# Altium PCB MicrophoneArray.Sensors.WithConnector.ForPcbFactory.PcbDoc
Units mm, origin at the board's own origin, x right, y up, seen from the top; angles counter-clockwise.
Board outline 43 x 43 mm, 2 copper layers (Top Layer, Bottom Layer); 30 components, 13 nets, 83 pads, 50 vias.
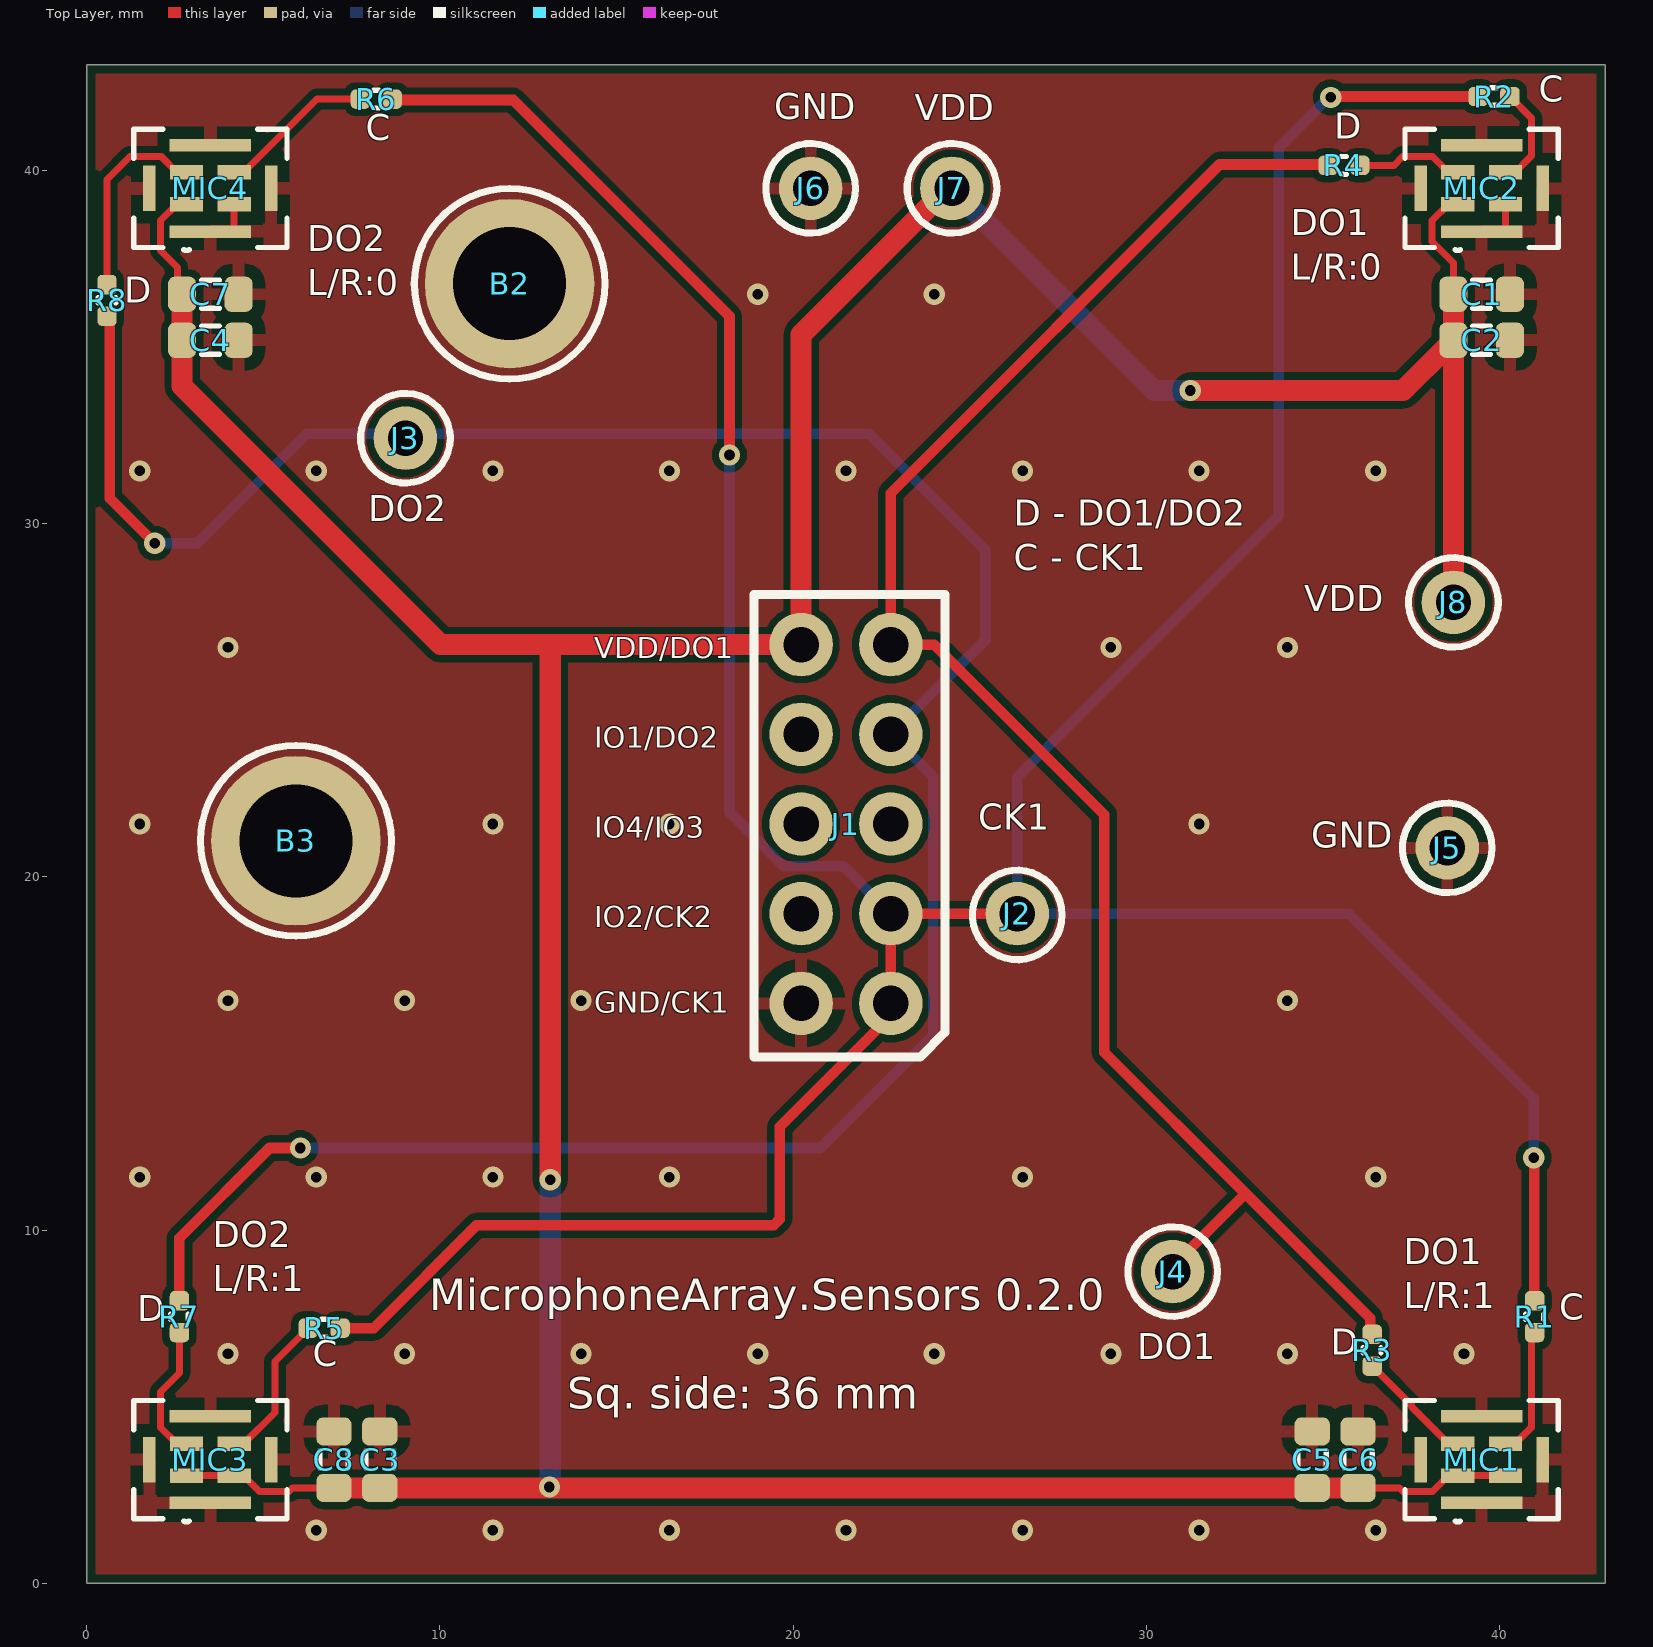
[diagram p0: Top Layer view]
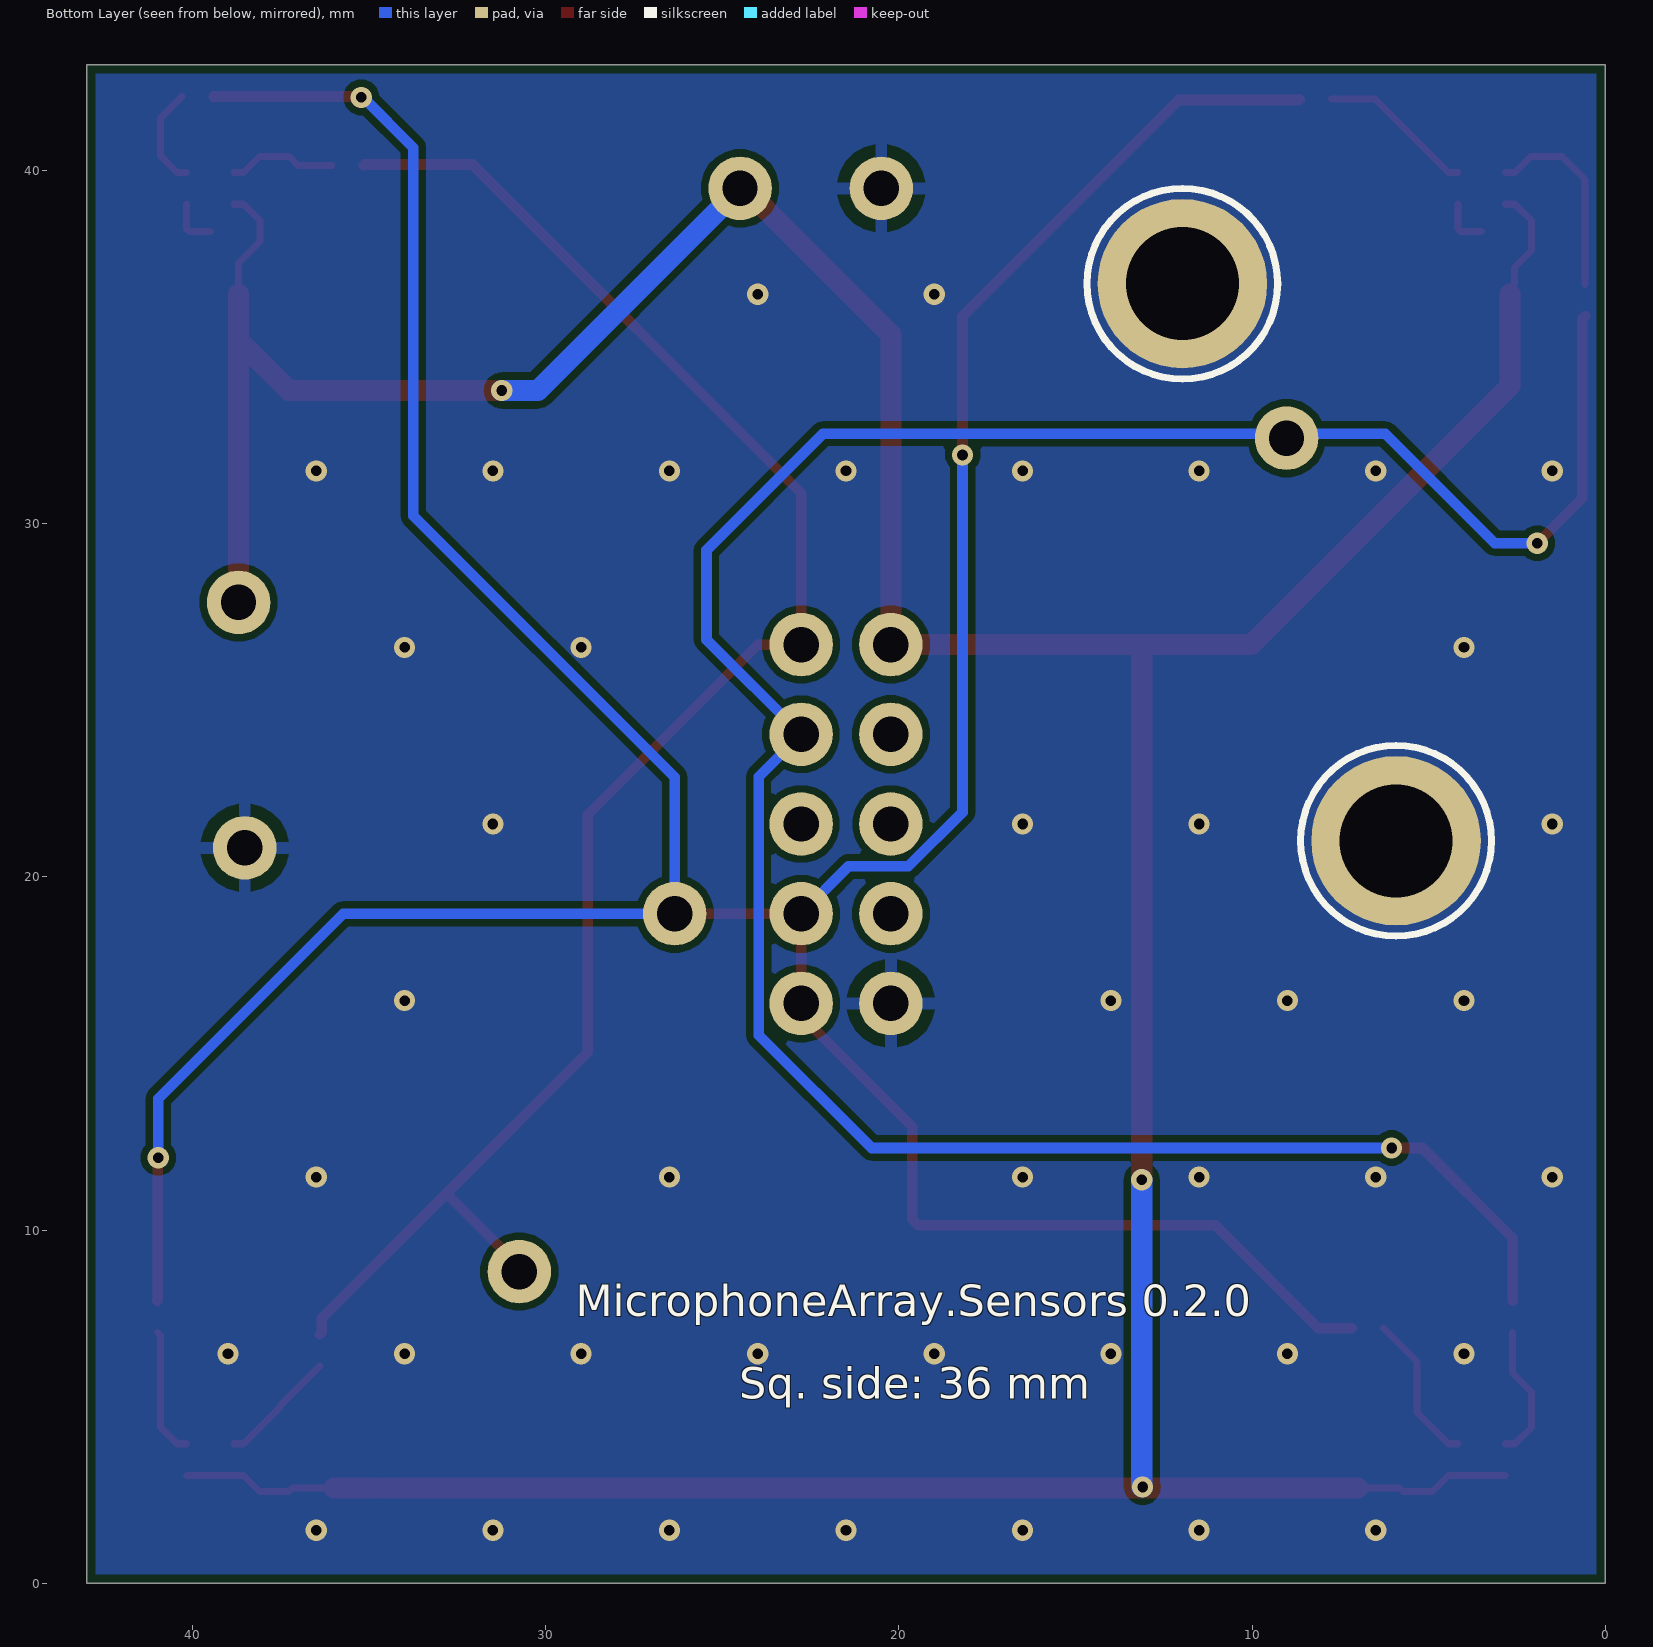
[diagram p1: Bottom Layer view, seen from below]
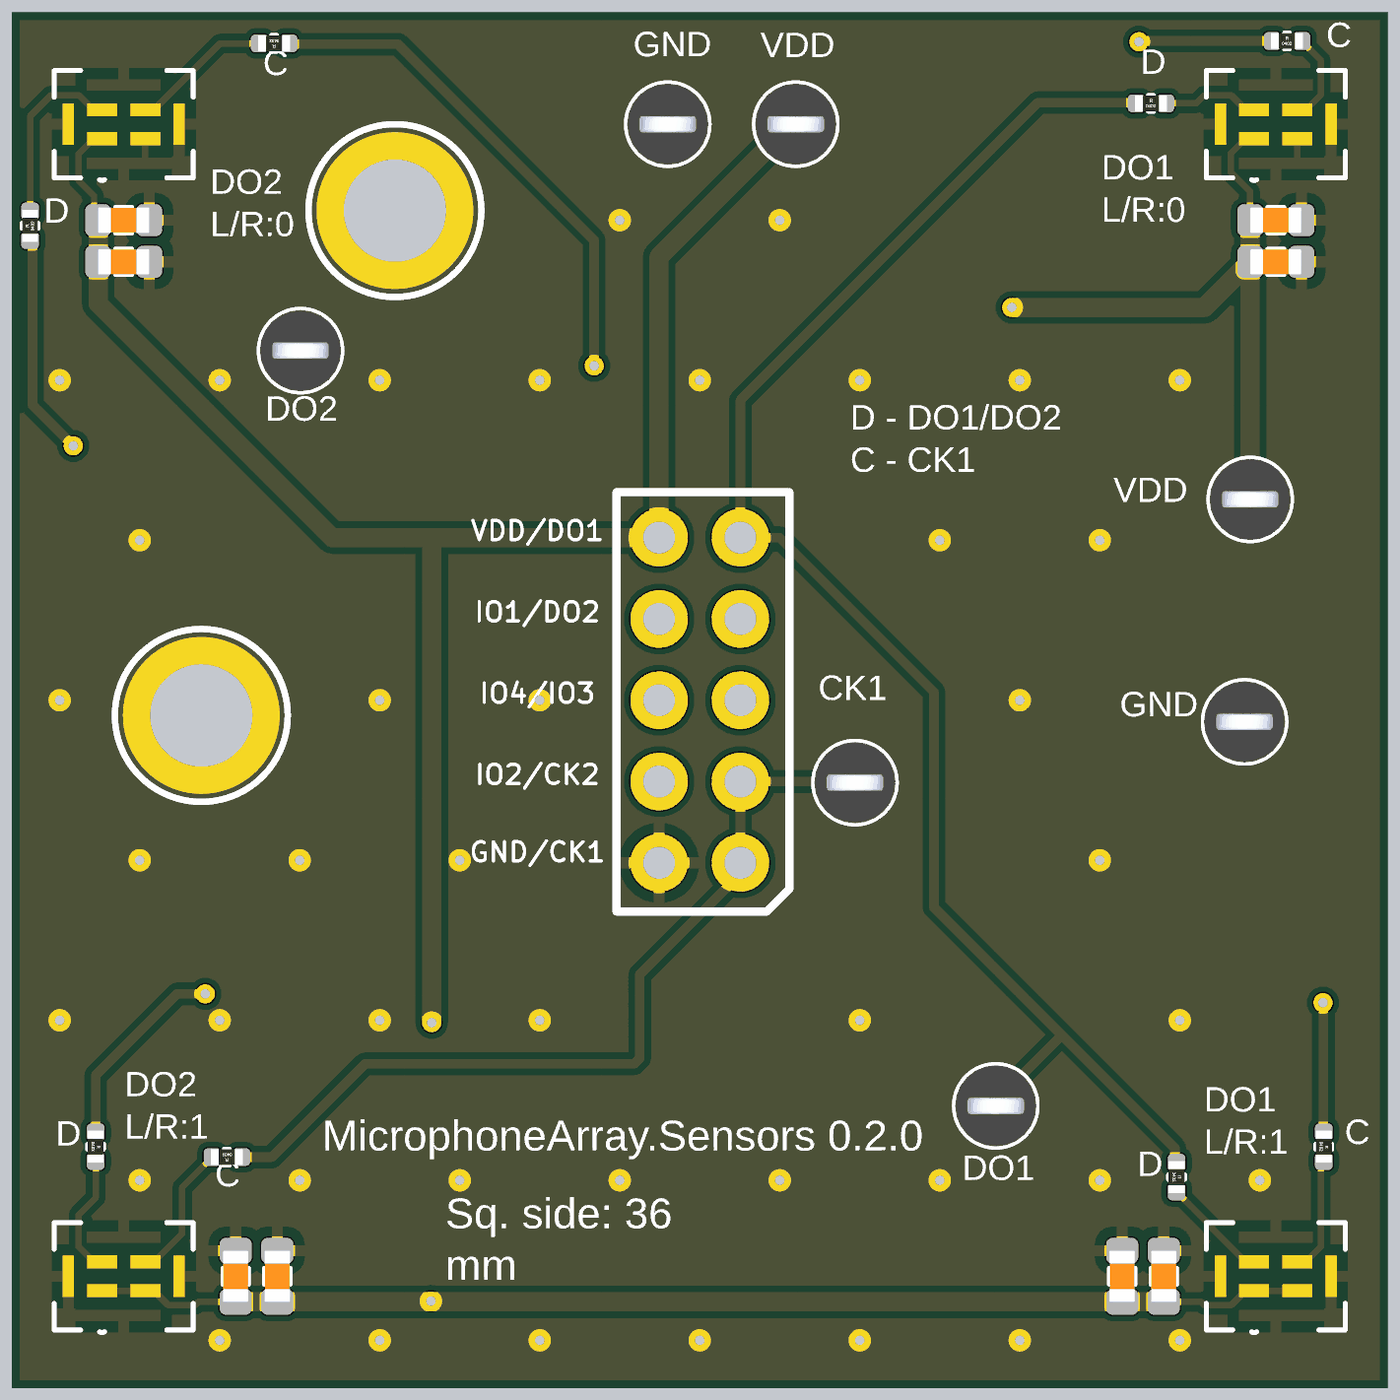
[diagram p2: 3D render of the assembled board from above, using the file's embedded part models]

## Layer stack, top to bottom
Top Solder: solder mask 0.0102, Solder Resist, Dk 3.5
Top Layer: signal copper 0.0356
Dielectric 1: dielectric 0.32, FR-4, Dk 4.8
Bottom Layer: signal copper 0.0356
Bottom Solder: solder mask 0.0102, Solder Resist, Dk 3.5

## Board outline
0,0 0,43 43,43 43,0

## Design rules (kind name [scope] priority, off if disabled: settings)
AcuteAngle [All] p1: minimum=3.50000000000000E+0001 checktracksonly=FALSE
BoardOutlineClearance "BoardOutlineClearance 1" [All] p1: gap=0.25 ignorepadtopadclearanceinfootprint=FALSE except(0: Arc-SplitContinuation Track-SplitContinuation SMDPad-SplitContinuation THPad-SplitContinuation Via-SplitContinuation Fill-SplitContinuation Poly-SplitContinuation Region-SplitContinuation Text-SplitContinuation) // Milling
BoardOutlineClearance "BoardOutlineClearance 2" [All] p2: gap=0.4 ignorepadtopadclearanceinfootprint=FALSE except(0: Arc-SplitContinuation Track-SplitContinuation SMDPad-SplitContinuation THPad-SplitContinuation Via-SplitContinuation Fill-SplitContinuation Poly-SplitContinuation Region-SplitContinuation Text-SplitContinuation) // V-Cut
Clearance "Clearance-2 1 Oz" [All] p1: gap=0.15 ignorepadtopadclearanceinfootprint=FALSE except(0.2: Arc-Fill Arc-Poly Track-Fill Track-Poly SMDPad-Fill SMDPad-Poly THPad-Fill THPad-Poly Via-Fill Via-Poly Fill-Fill Fill-Poly Poly-Poly; 0.25: Arc-Hole Track-Hole SMDPad-Hole THPad-Hole Via-Hole Fill-Hole Poly-Hole Region-Hole Text-Hole) // Advance
Clearance "Clearance 3 Oz" [All] p2: gap=0.35 ignorepadtopadclearanceinfootprint=FALSE except(0.25: Arc-Hole Track-Hole SMDPad-Hole THPad-Hole Via-Hole Fill-Hole Poly-Hole Region-Hole Text-Hole)
Clearance "Clearance 2 Oz" [All] p3: gap=0.3 ignorepadtopadclearanceinfootprint=FALSE except(0.25: Arc-Hole Track-Hole SMDPad-Hole THPad-Hole Via-Hole Fill-Hole Poly-Hole Region-Hole Text-Hole)
Clearance "Clearance-1 1 Oz" [All] p4: gap=0.2 ignorepadtopadclearanceinfootprint=FALSE except(0.25: Arc-Hole Track-Hole SMDPad-Hole THPad-Hole Via-Hole Fill-Hole Poly-Hole Region-Hole Text-Hole) // Standart
Clearance "Clearance-1 1/2 Oz" [All] p5: gap=0.125 ignorepadtopadclearanceinfootprint=FALSE except(0.2: Arc-Fill Arc-Poly Track-Fill Track-Poly SMDPad-SMDPad SMDPad-Fill SMDPad-Poly THPad-Fill THPad-Poly Via-Fill Via-Poly Fill-Fill Fill-Poly Poly-Poly Poly-Region Poly-Text; 0.25: Arc-Hole Track-Hole SMDPad-Hole THPad-Hole Via-Hole Fill-Hole Poly-Hole Region-Hole Text-Hole) // Standart
Clearance "Clearance-2 1/2 Oz" [All] p6: gap=0.1 ignorepadtopadclearanceinfootprint=FALSE except(0.15: Arc-Fill Arc-Poly Track-Fill Track-Poly SMDPad-SMDPad SMDPad-Fill SMDPad-Poly THPad-Fill THPad-Poly Via-Fill Via-Poly Fill-Fill Fill-Poly Poly-Poly Poly-Region Poly-Text; 0.25: Arc-Hole Track-Hole SMDPad-Hole THPad-Hole Via-Hole Fill-Hole Poly-Hole Region-Hole Text-Hole) // Advance
DiffPairsRouting "DiffPairsRouting 1 Oz" [All] p1: maxlimit=0.254 minlimit=0.2 mostfreqgap=0.254 toplayer_minwidth=0.2 toplayer_maxwidth=0.381 toplayer_prefwidth=0.381 bottomlayer_minwidth=0.2 bottomlayer_maxwidth=0.381 bottomlayer_prefwidth=0.381 maxuncoupledlength=12.7
DiffPairsRouting "DiffPairsRouting 1/2 Oz" [All] p2: maxlimit=0.254 minlimit=0.1 mostfreqgap=0.254 toplayer_minwidth=0.1 toplayer_maxwidth=0.381 toplayer_prefwidth=0.381 bottomlayer_minwidth=0.1 bottomlayer_maxwidth=0.381 bottomlayer_prefwidth=0.381 maxuncoupledlength=12.7
HoleSize "Minimum HoleSize" [IsPad] p1: absolutevalues=TRUE maxlimit=5.9 minlimit=0.6 maxpercent=80.000 minpercent=20.000
HoleSize "Minimum HoleSize VIA 1" [IsVia] p2: absolutevalues=TRUE maxlimit=5.9 minlimit=0.3 maxpercent=80.000 minpercent=20.000 // Standart
HoleSize "Minimum HoleSize VIA 2" [IsVia] p3: absolutevalues=TRUE maxlimit=5.9 minlimit=0.2 maxpercent=80.000 minpercent=20.000 // Advance
HoleToHoleClearance Hole2HoleClearance [All] p1: gap=0.25 allowstackedmicrovias=FALSE
MinimumAnnularRing "Minimum AR VIA Standart" [IsVia] p1: minimumring=0.15
MinimumAnnularRing "Minimum AR PAD Standart" [IsPAD] p2: minimumring=0.2
MinimumAnnularRing "Minimum AR VIA Advance" [IsVia] p3: minimumring=0.1
MinimumAnnularRing "Minimum AR PAD Advance" [IsPAD] p4: minimumring=0.15
MinimumSolderMaskSliver "SolderMask Bridge Standart" [All] p1: minsoldermaskwidth=0.15 // All Masks
MinimumSolderMaskSliver "SolderMask Bridge Advance" [All] p2: minsoldermaskwidth=0.1 // Mask LDI
PlaneClearance "PlaneClearance 3 Oz" [All] p1: clearance=0.35
PlaneClearance "PlaneClearance 2 Oz" [All] p2: clearance=0.3
PlaneClearance "PlaneClearance 1 Oz" [All] p3: clearance=0.2
PlaneClearance "PlaneClearance-1 1/2 Oz" [All] p4: clearance=0.2 // Standart
PlaneClearance "PlaneClearance-2 1/2 Oz" [All] p5: clearance=0.15 // Advance
PlaneConnect "TermalConnect 3 Oz" [All] p1: planeconnectstyle=Relief reliefexpansion=0.2 reliefentries=4 reliefconductorwidth=0.35 reliefairgap=0.35 // Standart
PlaneConnect "TermalConnect 2 Oz" [All] p2: planeconnectstyle=Relief reliefexpansion=0.2 reliefentries=4 reliefconductorwidth=0.3 reliefairgap=0.3 // Standart
PlaneConnect "TermalConnect-1 1 Oz" [All] p3: planeconnectstyle=Relief reliefexpansion=0.2 reliefentries=4 reliefconductorwidth=0.2 reliefairgap=0.2 // Standart
PlaneConnect "TermalConnect-2 1 Oz" [All] p4: pad.planeconnectstyle=Relief pad.reliefexpansion=0.15 pad.reliefentries=4 pad.reliefconductorwidth=0.2 pad.reliefairgap=0.2 via.planeconnectstyle=Direct via.reliefexpansion=0.15 via.reliefentries=4 via.reliefconductorwidth=0.15 via.reliefairgap=0.15 // Advance
PlaneConnect "TermalConnect-1 1/2 Oz" [All] p5: planeconnectstyle=Relief reliefexpansion=0.2 reliefentries=4 reliefconductorwidth=0.2 reliefairgap=0.2 // Standart
PlaneConnect "TermalConnect-2 1/2 Oz" [All] p6: pad.planeconnectstyle=Relief pad.reliefexpansion=0.15 pad.reliefentries=4 pad.reliefconductorwidth=0.15 pad.reliefairgap=0.15 via.planeconnectstyle=Direct via.reliefexpansion=0.15 via.reliefentries=4 via.reliefconductorwidth=0.15 via.reliefairgap=0.15 // Advance
PolygonConnect "PolygonConnect 3 Oz" [All] p1: thpad.connectstyle=Relief thpad.reliefconductorwidth=0.35 thpad.reliefentries=4 thpad.polygonreliefangle="90 Angle" thpad.airgapwidth=0.35 smdpad.connectstyle=Relief smdpad.reliefconductorwidth=0.35 smdpad.reliefentries=4 smdpad.polygonreliefangle="90 Angle" smdpad.airgapwidth=0.35 via.connectstyle=Direct via.reliefconductorwidth=0.254 via.reliefentries=4 via.polygonreliefangle="90 Angle" via.airgapwidth=0.254
PolygonConnect "PolygonConnect 2 Oz" [All] p2: thpad.connectstyle=Relief thpad.reliefconductorwidth=0.3 thpad.reliefentries=4 thpad.polygonreliefangle="90 Angle" thpad.airgapwidth=0.3 smdpad.connectstyle=Relief smdpad.reliefconductorwidth=0.3 smdpad.reliefentries=4 smdpad.polygonreliefangle="90 Angle" smdpad.airgapwidth=0.3 via.connectstyle=Direct via.reliefconductorwidth=0.254 via.reliefentries=4 via.polygonreliefangle="90 Angle" via.airgapwidth=0.254
PolygonConnect "PolygonConnect-1 1 Oz" [All] p3: thpad.connectstyle=Relief thpad.reliefconductorwidth=0.2 thpad.reliefentries=4 thpad.polygonreliefangle="90 Angle" thpad.airgapwidth=0.2 smdpad.connectstyle=Relief smdpad.reliefconductorwidth=0.2 smdpad.reliefentries=4 smdpad.polygonreliefangle="90 Angle" smdpad.airgapwidth=0.2 via.connectstyle=Direct via.reliefconductorwidth=0.254 via.reliefentries=4 via.polygonreliefangle="90 Angle" via.airgapwidth=0.254 // Standart
PolygonConnect "PolygonConnect-2 1 Oz" [All] p4: thpad.connectstyle=Relief thpad.reliefconductorwidth=0.15 thpad.reliefentries=4 thpad.polygonreliefangle="90 Angle" thpad.airgapwidth=0.15 smdpad.connectstyle=Relief smdpad.reliefconductorwidth=0.15 smdpad.reliefentries=4 smdpad.polygonreliefangle="90 Angle" smdpad.airgapwidth=0.15 via.connectstyle=Direct via.reliefconductorwidth=0.254 via.reliefentries=4 via.polygonreliefangle="90 Angle" via.airgapwidth=0.254 // Advance
PolygonConnect "PolygonConnect-1 1/2 Oz" [All] p5: thpad.connectstyle=Relief thpad.reliefconductorwidth=0.15 thpad.reliefentries=4 thpad.polygonreliefangle="90 Angle" thpad.airgapwidth=0.2 smdpad.connectstyle=Relief smdpad.reliefconductorwidth=0.2 smdpad.reliefentries=4 smdpad.polygonreliefangle="90 Angle" smdpad.airgapwidth=0.2 via.connectstyle=Direct via.reliefconductorwidth=0.254 via.reliefentries=4 via.polygonreliefangle="90 Angle" via.airgapwidth=0.254 // Standart
PolygonConnect "PolygonConnect-2 1/2 Oz" [All] p6: thpad.connectstyle=Relief thpad.reliefconductorwidth=0.125 thpad.reliefentries=4 thpad.polygonreliefangle="90 Angle" thpad.airgapwidth=0.15 smdpad.connectstyle=Relief smdpad.reliefconductorwidth=0.125 smdpad.reliefentries=4 smdpad.polygonreliefangle="90 Angle" smdpad.airgapwidth=0.15 via.connectstyle=Direct via.reliefconductorwidth=0.254 via.reliefentries=4 via.polygonreliefangle="90 Angle" via.airgapwidth=0.254 // Advance
RoutingCorners [All] p1 off: cornerstyle=45-Degree minsetback=2.54 maxsetback=2.54
RoutingVias [All] p1: holewidth=0.3 width=0.6 viastyle="Through Hole" minholewidth=0.2 minwidth=0.4 maxholewidth=5.9 maxwidth=6.4
SilkToSilkClearance Silk2SilkClearance [All] p1 off: silktosilkclearance=0.15
SilkToSolderMaskClearance Silk2SolderMaskClearance [IsPad] p1 off: minsilkscreentomaskgap=0.15 clearancetoexposedcopper=TRUE
SolderMaskExpansion SolderMaskExpansion-1 [All] p1: expansion=0.05 istentingtop=FALSE // Standart
SolderMaskExpansion "SolderMaskExpansion LDI" [All] p2: expansion=0.025 istentingtop=FALSE // Advance
UnRoutedNet [All] p1: checkbadconnections=TRUE
Width "Width 1 Oz" [All] p1: maxlimit=10 minlimit=0.15 preferedwidth=0.2 checkconnectedcopper=TRUE
Width "Width 3 Oz" [All] p2: maxlimit=10 minlimit=0.35 preferedwidth=0.4 checkconnectedcopper=TRUE
Width "Width 2 Oz" [All] p3: maxlimit=10 minlimit=0.3 preferedwidth=0.35 minimp=50.000000 maximp=50.000000 favimp=50.000000 checkconnectedcopper=TRUE
Width "Width 1/2 Oz" [All] p4: maxlimit=10 minlimit=0.1 preferedwidth=0.125 checkconnectedcopper=TRUE
20 further rules are at their usual default settings.

## Classes and differential pairs
component class MicrophoneArray.Sensors.Electronics: C1 C2 C3 C4 C5 C6 C7 C8 MIC1 MIC2 MIC3 MIC4 R1 R2 R3 R4 R5 R6 R7 R8
component class Connector: B2 B3 J1 J2 J3 J4 J5 J6 J7 J8

## Components (designator, comment, footprint, x,y, rotation, side; value= is the part's Value field where it differs from the comment)
B2 "M3" M3_Plated_Hole_NO_3D 11.975,36.8 r0 top
B3 "M3" M3_Plated_Hole_NO_3D 5.925,21.025 r0 top
C1 "100nF" CAP_0603 39.5,36.5 r180 top
C2 "10uF" CAP_0603 39.5,35.2 r180 top
C3 "100nF" CAP_0603 8.3,3.5 r270 top
C4 "10uF" CAP_0603 3.5,35.2 r180 top
C5 "100nF" CAP_0603 34.7,3.5 r270 top
C6 "10uF" CAP_0603 36,3.5 r270 top
C7 "100nF" CAP_0603 3.5,36.5 r180 top
C8 "10uF" CAP_0603 7,3.5 r270 top
J1 "PDB-10" PDB-10 21.5,21.5 r90 top
J2 "5001" 5001#1 26.35,18.925 r0 top
J3 "5001" 5001#2 9.025,32.425 r0 top
J4 "5001" 5001#2 30.75,8.825 r0 top
J5 "5001" 5001#2 38.525,20.825 r0 top
J6 "5001" 5001#2 20.5,39.5 r0 top
J7 "5001" 5001#2 24.5,39.5 r0 top
J8 "5001" 5001#2 38.7,27.775 r0 top
MIC1 "MP34DT01TR-M" HCLGA_3X4X1_STM 39.5,3.5 r90 top
MIC2 "MP34DT01TR-M" HCLGA_3X4X1_STM 39.5,39.5 r90 top
MIC3 "MP34DT01TR-M" HCLGA_3X4X1_STM 3.5,3.5 r90 top
MIC4 "MP34DT01TR-M" HCLGA_3X4X1_STM 3.5,39.5 r90 top
R1 "0R" RES_0402 41,7.55 r270 top
R2 "0R" RES_0402 39.85,42.1 r0 top
R3 "0R" RES_0402 36.4,6.6 r270 top
R4 "0R" RES_0402 35.6,40.15 r0 top
R5 "0R" RES_0402 6.725,7.225 r180 top
R6 "0R" RES_0402 8.2,42.025 r180 top
R7 "0R" RES_0402 2.625,7.55 r270 top
R8 "0R" RES_0402 0.575,36.325 r90 top

## Footprints (in the part's own frame and the unit in brackets; to place one, negate y for a bottom-side part, rotate by r counter-clockwise, add the part's x,y. Pads: shape width x height; smd on the part's side, far side on the other; paste and mask are expansions set on the pad)
5001#1 [mm] "Keystone Electronics, Black PC Test Point, Miniature Phosphor Bronze Silver Plating Through Hole Mounting Type"
  round 1.8 hole 1: 1(0,0.035)
  silkscreen extent -1.27,-1.27 1.27,1.27, body extent -1.27,-1.26 1.27,1.26, height 4.57
5001#2 [mm] "Keystone Electronics, Black PC Test Point, Miniature Phosphor Bronze Silver Plating Through Hole Mounting Type"
  round 1.8 hole 1: 1(0,0)
  silkscreen extent -1.27,-1.27 1.27,1.27, body extent -1.27,-1.26 1.27,1.26, height 4.57
CAP_0603 [mm]
  rrect50% 0.8x1 smd: 1(-0.8,0) 2(0.8,0)
  silkscreen extent -0.25,-0.4 0.25,0.4, body extent -0.8,-0.4 0.8,0.4, height 0.8
HCLGA_3X4X1_STM [mil]
  rect 16x37 smd paste-8 mask+0: 1(-17.75,26.63) 2(-17.75,-26.62) 3(17.75,-26.62) 4(17.75,26.63)
  rect 51x14 smd paste-7 mask+0: 5(0,68) 6(0,-68)
  rect 14x91 smd paste-45.5 mask-45.5: 7(-48.25,0) 8(48.25,0)
  Top Layer region: 0,7 0,7 0,7 0,7 0,7 0,7 0,7 0,7
  Top Layer region: 0,-7 0,-7 0,-7 0,-7 0,-7 0,-7 0,-7 0,-7
  silkscreen extent -69,-86 66,85
M3_Plated_Hole_NO_3D [mm] "Machine Screw, M3"
  round 4.8 hole 3.2: 1(0,0)
  silkscreen extent -2.7,-2.7 2.7,2.7
PDB-10 [mm]
  round 1.8 hole 1: 1(-5.08,-1.27) 2(-5.08,1.27) 3(-2.54,-1.27) 4(-2.54,1.27) 5(0,-1.27) 6(0,1.27) 7(2.54,-1.27) 8(2.54,1.27) 9(5.08,-1.27) 10(5.08,1.27)
  silkscreen extent -6.6,-2.8 6.5,2.6
RES_0402 [mm] "0.062W"
  rrect50% 0.55x0.55 smd: 1(-0.45,0) 2(0.45,0)
  silkscreen extent -0.07,-0.25 0.08,0.25, body extent -0.5,-0.25 0.5,0.25, height 0.35

## Part data
B2 B3: "Machine Screw, M3"
C1 C2 C3 C4 C5 C6 C7 C8: library part Capacitor_Non-polar
J2 J3 J4 J5 J6 J7 J8: library part Test_Point
MIC1 MIC2 MIC3 MIC4: "Digital MEMS microphone, low power, ultra-compact, top-port, omnidirectional, 120 dBSPL AOP, 61 dB SNR, -26 dBFS sensitivity", Manufacturer_Name=STMicroelectronics, Copyright="Copyright (C) 2026 Ultra Librarian. All rights reserved.", Datasheet=https://www.st.com/resource/en/datasheet/mp34dt01-m.pdf, Digi-Key_Part_Number_1=497-15102-2-ND, Digi-Key_Part_Number_2=497-15102-1-ND, Digi-Key_Part_Number_3=497-15102-6-ND, Manufacturer_Part_Number=MP34DT01TR-M, RefDes=RefDes, Type=Type
R1 R2 R3 R4 R5 R6 R7 R8: library part Resistor

## Via types
v1: diameter 0.6, hole 0.3, Top Layer to Bottom Layer, 50 vias

## Nets (pads, with @x,y where several pads share a name; then routed paths per layer and width w, separated by ;. In a path a pad name is that pad's centre, name@x,y a point inside that pad or via, vN(x,y) a via of type N, cw(c..) or ccw(c..) an arc to the next point about the centre after c; other vN are vias at no path point)
CK1: J1.1 J1.3 J2.1 R1.1 R2.1 R5.1 R6.1 | length 112.7
  Top Layer w0.3: R5.1 8.125,7.225 11.038,10.138 19.449,10.138 19.625,10.313 19.625,12.925 22.77,16.07 J1.3 J2.1 ; R6.1 8.675,42 12.075,42 18.2,35.875 v1(18.2,31.95) ; v1(35.225,42.075) 35.25,42.1 R2.1 ; v1(40.975,12.05) 40.987,12.037 40.987,8.013 R1.1
  Bottom Layer w0.3: v1(18.2,31.95) 18.2,21.833 19.733,20.3 21.43,20.3 J1.3 ; v1(35.225,42.075) 35.175,42.075 33.75,40.65 33.75,30.225 26.35,22.825 J2.1 35.74,18.96 40.975,13.725 v1(40.975,12.05)
DO1: J1.9 J4.1 R3.1 R4.1 | length 49.4
  Top Layer w0.3: 28.816,15.034 32.812,11.037 36.347,7.503 36.347,7.103 R3.1 ; 28.816,15.064 28.816,21.759 23.995,26.58 J1.9 22.77,30.87 32.075,40.175 35.125,40.175 R4.1 ; J4.1 30.75,8.975 32.791,11.016
DO2: J1.7 J3.1 R7.1 R8.1 | length 74
  Top Layer w0.3: R8.1 0.65,35.8 0.65,30.725 v1(1.925,29.45) ; R7.1 2.625,9.775 5.175,12.325 v1(6.05,12.325)
  Bottom Layer w0.3: v1(1.925,29.45) 3.134,29.45 6.234,32.55 9.025,32.55 22.15,32.55 25.45,29.25 25.45,26.72 J1.7 23.97,22.84 23.97,15.52 20.775,12.325 v1(6.05,12.325)
GND: B2.1 B3.1 C1.1 C2.1 C3.1 C4.1 C5.1 C6.1 C7.1 C8.1 J1.2 J5.1 J6.1 MIC1.5 MIC1.6 MIC1.7 MIC1.8 MIC2.2 MIC2.5 MIC2.6 MIC2.7 MIC2.8 MIC3.5 MIC3.6 MIC3.7 MIC3.8 MIC4.2 MIC4.5 MIC4.6 MIC4.7 MIC4.8 | length 2.8
  Top Layer w0.2: MIC4.7 4.094,38.274 4.171,38.352 4.171,39.044 MIC4.2 ; MIC2.7 40.094,38.274 40.171,38.352 40.171,39.044 MIC2.2
  other v1: 6.5,1.5 11.5,1.5 16.5,1.5 21.5,1.5 26.5,1.5 31.5,1.5 36.5,1.5 4,6.5 9,6.5 14,6.5 19,6.5 24,6.5 29,6.5 34,6.5 39,6.5 1.5,11.5 6.5,11.5 11.5,11.5 16.5,11.5 26.5,11.5 36.5,11.5 4,16.5 9,16.5 14,16.5 34,16.5 1.5,21.5 11.5,21.5 16.5,21.5 31.5,21.5 4,26.5 29,26.5 34,26.5 1.5,31.5 6.5,31.5 11.5,31.5 16.5,31.5 21.5,31.5 26.5,31.5 31.5,31.5 36.5,31.5 19,36.5 24,36.5
NetMIC1_3: MIC1.3 R1.2 | length 3.6
  Top Layer w0.2: MIC1.3 40.443,3.951 40.906,4.414 40.906,7.006 R1.2
NetMIC1_4: MIC1.4 R3.2 | length 3.4
  Top Layer w0.2: R3.2 37.508,5.042 37.508,5 38.557,3.951 MIC1.4
NetMIC2_3: MIC2.3 R2.2 | length 2.9
  Top Layer w0.2: MIC2.3 40.443,39.951 40.906,40.414 40.906,41.494 R2.2
NetMIC2_4: MIC2.4 R4.2 | length 3.1
  Top Layer w0.2: R4.2 37.014,40.15 37.262,40.398 38.11,40.398 38.557,39.951 MIC2.4
NetMIC3_3: MIC3.3 R5.2 | length 4.3
  Top Layer w0.2: MIC3.3 4.443,3.951 5.33,4.837 5.33,6.28 R5.2
NetMIC3_4: MIC3.4 R7.2 | length 3.8
  Top Layer w0.2: R7.2 2.625,5.951 2.094,5.421 2.094,4.414 2.557,3.951 MIC3.4
NetMIC4_3: MIC4.3 R6.2 | length 4.4
  Top Layer w0.2: MIC4.3 4.443,39.951 6.517,42.025 R6.2
NetMIC4_4: MIC4.4 R8.2 | length 5.7
  Top Layer w0.2: R8.2 0.575,39.75 1.223,40.398 2.11,40.398 2.557,39.951 MIC4.4
VDD_MICS: C1.2 C2.2 C3.2 C4.2 C5.2 C6.2 C7.2 C8.2 J1.10 J7.1 J8.1 MIC1.1 MIC1.2 MIC2.1 MIC3.1 MIC3.2 MIC4.1 | length 131.7
  Top Layer w0.2: C7.2@2.575,36.815 2.575,37.259 2.094,37.739 2.094,38.586 2.557,39.049 MIC4.1 ; MIC3.1 MIC3.2 4.443,3.049 4.89,2.602 5.728,2.602 5.826,2.7 C8.2 ; C6.2 37.174,2.7 37.272,2.602 38.11,2.602 38.557,3.049 MIC1.1 MIC1.2 ; C1.2 38.7,37.387 38.094,37.993 38.094,38.586 38.557,39.049 MIC2.1
  Top Layer w0.6: C7.2 C4.2 2.7,33.9 10.02,26.58 13.125,26.58 ; C8.2 C3.2 13.075,2.7 v1(13.1,2.725) 13.125,2.7 C5.2@34.5,2.7 ; v1(13.125,11.425) 13.125,26.58 ; J7.1 24.438,39.438 24.438,39.563 20.23,35.355 J1.10 13.125,26.58 ; v1(31.25,33.775) 37.275,33.775 38.5,35 38.6,35 38.7,35.1 C2.2 ; C5.2 C6.2 ; J8.1 C2.2 ; C1.2 C2.2
  Bottom Layer w0.6: v1(13.1,2.725) 13.125,2.75 v1(13.125,11.425) ; J7.1 30.225,33.775 v1(31.25,33.775)
pads on no net: J1.4 J1.5 J1.6 J1.8

## Polygon pours and split planes (outlines as drawn)
GND on Bottom Layer "NONET_L-01_P-001" (solid, pour order 1): 0.1,43 43,43 43.075,42.925 43,42.85 43,-0.05 0.125,-0.05 -0.05,0.125
GND on Top Layer "NONET_L-01_P-001" (solid, pour order 0): 0.125,42.95 0.2,43.025 42.975,43.025 42.975,0 42.9,0.075 -0.225,0.075

## Silkscreen, mask and mechanical layers (free items; w line width, h text height)
Top Overlay:
  text "C" at 41.122,41.711 h1.25
  text "GND" at 19.473,41.211 h1.25
  text "VDD" at 23.448,41.186 h1.25
  text "D" at 35.324,40.661 h1.25
  text "C" at 7.9,40.625 h1.25
  text "DO1 / L/R:0" at 34.1,36.675 h1.25
  text "DO2 / L/R:0" at 6.25,36.225 h1.25
  text "D" at 1.057,36.013 h1.25
  text "DO2" at 7.975,29.825 h1.25
  text "D - DO1/DO2 / C - CK1" at 26.25,28.45 h1.25
  text "VDD" at 34.473,27.286 h1.25
  text "VDD/DO1" at 14.375,26.193 h0.6
  text "IO1/DO2" at 14.375,23.652 h0.6
  text "IO4/IO3" at 14.375,21.112 h0.6
  text "CK1" at 25.25,21.1 h1.25
  text "GND" at 34.673,20.586 h1.25
  text "IO2/CK2" at 14.375,18.572 h0.6
  text "GND/CK1" at 14.375,16.153 h0.6
  text "DO2 / L/R:1" at 3.575,8.025 h1.25
  text "DO1 / L/R:1" at 37.3,7.55 h1.25
  text "MicrophoneArray.Sensors 0.2.0" at 9.698,7.434 h1.52
  text "C" at 41.7,7.225 h1.25
  text "D" at 1.425,7.175 h1.25
  text "D" at 35.225,6.225 h1.25
  text "DO1" at 29.75,6.1 h1.25
  text "C" at 6.4,5.9 h1.25
  text "Sq. side: 36 mm" at 13.6,4.65 h1.52
Bottom Overlay:
  text "MicrophoneArray.Sensors 0.2.0" at 29.15,7.261 h1.52
  text "Sq. side: 36 mm" at 24.525,4.925 h1.52
Mechanical 15:
  the board outline again, w0.254